# EAGLE board Headlightsv2 (EAGLE 7.6.0)
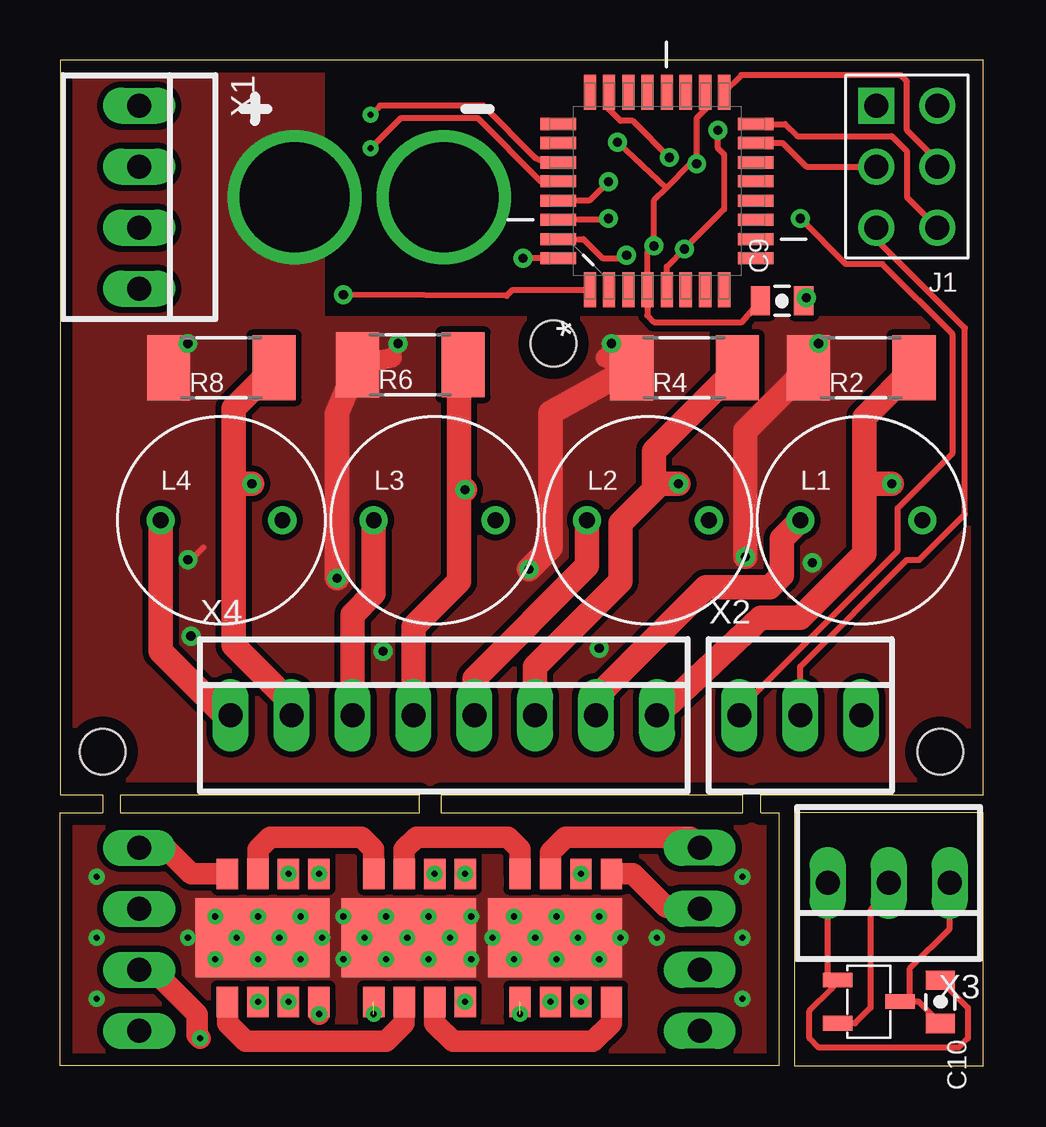
[diagram p0: board, top side]
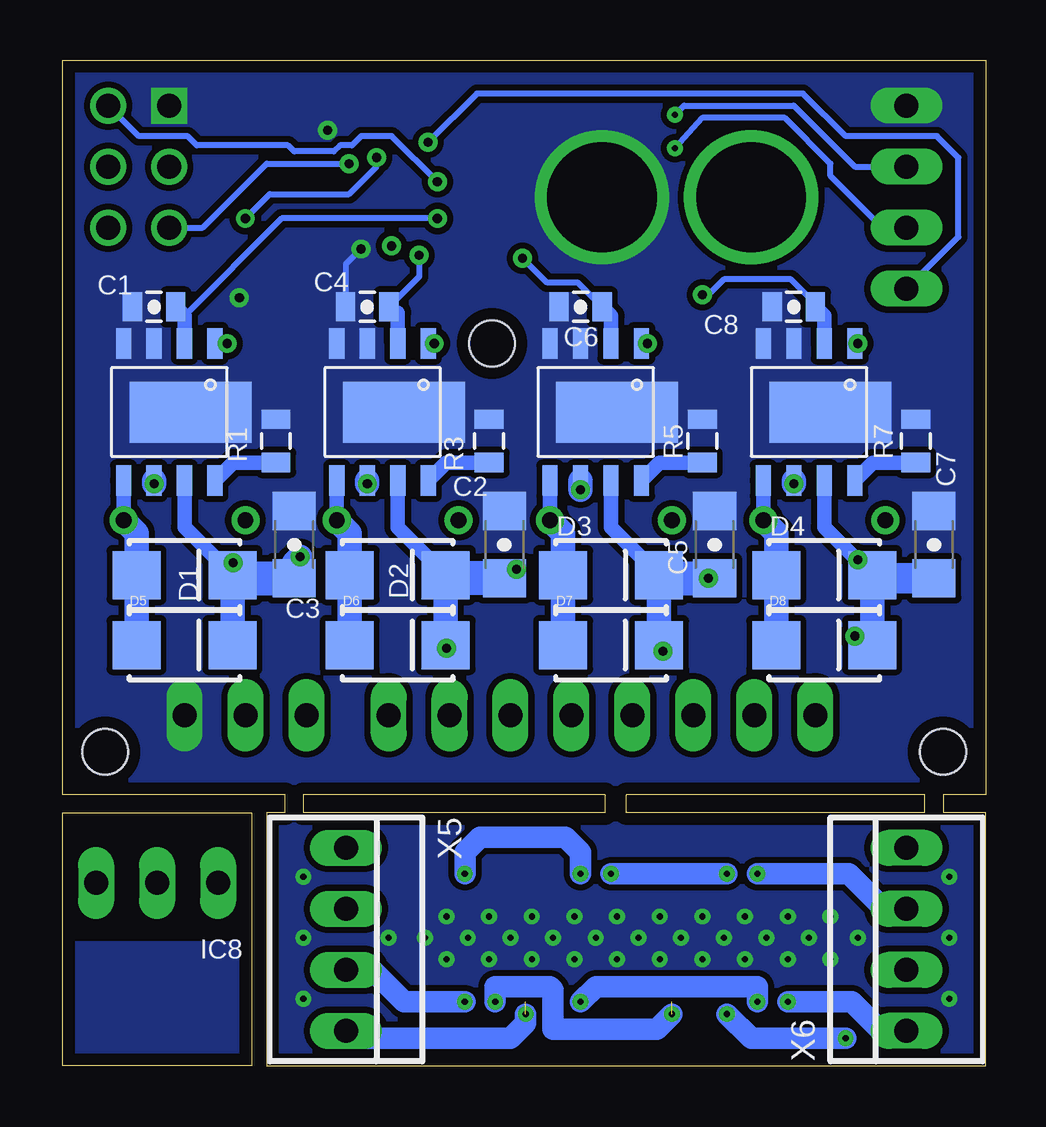
[diagram p1: board, bottom side, seen from below]

Size 38.48 x 41.91 mm. Coordinates in mm from the lower left corner, seen from the top.
Outline: 0,11.3 1.78,11.3 1.78,10.54 0,10.54 0,0 29.97,0 29.97,10.54 29.21,10.54 29.21,11.3 38.48,11.3 38.48,41.91 0,41.91 0,11.3
Outline: 2.54,11.3 14.99,11.3 14.99,10.54 2.54,10.54 2.54,11.3
Outline: 15.88,11.3 28.45,11.3 28.45,10.54 15.88,10.54 15.88,11.3
Outline: 30.61,10.54 30.61,0 38.48,0 38.48,10.54 30.61,10.54
Copper layers (1*16): Top 0.035mm / dielectric 1.5mm / Bottom 0.035mm
Design rules "PCBWAY": minimum track width 10mil, minimum drill 10mil, track to track 8mil, track to pad 8mil, pad to pad 8mil, via to via 8mil, smd to smd 8mil, copper to edge 20mil, drill to drill 8mil, minimum pad ring 10mil, minimum via ring 8mil, stop-mask expansion 4mil, vias tented up to drill 0mil, thermal gap 10mil
Holes 1.91 mm at 36.7,13.08 1.78,13.08 20.57,30.1

## Footprints (pad centres in the part's own frame; a part is rotated, then mirrored left to right if it is on the bottom)
0805-CAP = smd 0.8 x 1.2: 1 -0.9,0; 2 0.9,0
1206-CAP = smd 1.6 x 1.8: 1 -1.4,0; 2 1.4,0
SMA-DIODE_ALT = smd 2 x 2: A -2,0; C 2,0
PG-DSO-8-27 = smd 0.635 x 1.27: P$1 0,0; P$2 1.27,0; P$3 2.54,0; P$4 3.81,0; P$5 3.81,5.715; P$6 2.54,5.715; P$7 1.27,5.715; P$8 0,5.715 | smd 5.08 x 2.54: P$9 1.016,2.857
LED_RGBW_CUSTOM = smd 0.889 x 1.27: 1 0,-0.254; 2 1.27,-0.254; 3 2.54,-0.254; 4 3.81,-0.254; 5 3.81,5.08; 6 2.54,5.08; 7 1.27,5.08; 8 0,5.08 | smd 5.588 x 3.302: 9 1.46,2.413
SOT-23-3 = smd 1.219 x 0.61: 1 -1.36,0.78; 2 -1.36,-1.02; 3 1.24,-0.12
2X3PIN_.1' = drill 0.991: P$1 -1.27,1.27; P$2 1.27,1.27; P$3 -1.27,-1.27; P$4 1.27,-1.27; P$5 -1.27,-3.81 | drill 0.991 square: P$6 1.27,-3.81
IND_RLB_SERIES = drill 0.66: P$1 -2.54,0; P$2 2.54,0
0805 = smd 0.8 x 1.2: 1 -0.9,0; 2 0.9,0
R2010 = smd 1.8 x 2.7: 1 -2.2,0; 2 2.2,0
QFP80P900X900X120-32N = smd 1.473 x 0.508: 1 -4.115,2.794; 2 -4.115,2.007; 3 -4.115,1.194; 4 -4.115,0.406; 5 -4.115,-0.406; 6 -4.115,-1.194; 7 -4.115,-2.007; 8 -4.115,-2.794; 17 4.115,-2.794; 18 4.115,-2.007; 19 4.115,-1.194; 20 4.115,-0.406; 21 4.115,0.406; 22 4.115,1.194; 23 4.115,2.007; 24 4.115,2.794 | smd 0.508 x 1.473: 9 -2.794,-4.115; 10 -2.007,-4.115; 11 -1.194,-4.115; 12 -0.406,-4.115; 13 0.406,-4.115; 14 1.194,-4.115; 15 2.007,-4.115; 16 2.794,-4.115; 25 2.794,4.115; 26 2.007,4.115; 27 1.194,4.115; 28 0.406,4.115; 29 -0.406,4.115; 30 -1.194,4.115; 31 -2.007,4.115; 32 -2.794,4.115
22-23-2041 = drill 1 long: 1 -3.81,0; 2 -1.27,0; 3 1.27,0; 4 3.81,0
22-23-2031 = drill 1 long: 1 -2.54,0; 2 0,0; 3 2.54,0
22-23-2081 = drill 1 long: 1 -8.89,0; 2 -6.35,0; 3 -3.81,0; 4 -1.27,0; 5 1.27,0; 6 3.81,0; 7 6.35,0; 8 8.89,0

## Placement (x,y rotation side)
C1  10uF  [0805-CAP]  34.67,31.62 180 bottom
C2  1uF  [1206-CAP]  20.07,21.72 90 bottom
C3  1uF  [1206-CAP]  28.83,21.72 90 bottom
C4  10uF  [0805-CAP]  25.78,31.62 180 bottom
C5  1uF  [1206-CAP]  11.3,21.72 90 bottom
C6  10uF  [0805-CAP]  16.89,31.62 180 bottom
C7  1uF  [1206-CAP]  2.16,21.72 90 bottom
C8  10uF  [0805-CAP]  8,31.62 180 bottom
C9  0.33uF  [0805-CAP]  30.1,31.88 0 top
C10  0.33uF  [0805-CAP]  36.7,2.67 90 top
D1  [SMA-DIODE_ALT]  33.4,20.45 0 bottom
D2  [SMA-DIODE_ALT]  24.51,20.45 0 bottom
D3  [SMA-DIODE_ALT]  15.62,20.45 0 bottom
D4  [SMA-DIODE_ALT]  6.73,20.45 0 bottom
D5  [SMA-DIODE_ALT]  33.4,17.53 0 bottom
D6  [SMA-DIODE_ALT]  24.51,17.53 0 bottom
D7  [SMA-DIODE_ALT]  15.62,17.53 0 bottom
D8  [SMA-DIODE_ALT]  6.73,17.53 0 bottom
IC1  ILD6150_LED_DRIVER  [PG-DSO-8-27]  32.13,30.1 180 bottom
IC2  LED_RGBW_CONF2  [LED_RGBW_CUSTOM]  19.18,2.92 0 top
IC3  ILD6150_LED_DRIVER  [PG-DSO-8-27]  23.24,30.1 180 bottom
IC4  ILD6150_LED_DRIVER  [PG-DSO-8-27]  14.35,30.1 180 bottom
IC5  ILD6150_LED_DRIVER  [PG-DSO-8-27]  5.46,30.1 180 bottom
IC6  LED_RGBW_CONF2  [LED_RGBW_CUSTOM]  13.08,2.92 0 top
IC7  LED_RGBW_CONF2  [LED_RGBW_CUSTOM]  6.99,2.92 0 top
IC8  TEMP_MCP9701  [SOT-23-3]  33.78,2.79 0 top
J1  ISPHEADER  [2X3PIN_.1']  35.31,36.2 180 top
L1  33uH  [IND_RLB_SERIES]  33.4,22.73 0 top
L2  33uH  [IND_RLB_SERIES]  24.51,22.73 0 top
L3  33uH  [IND_RLB_SERIES]  15.62,22.73 0 top
L4  33uH  [IND_RLB_SERIES]  6.73,22.73 0 top
R1  10k  [0805]  29.59,26.04 90 bottom
R2  .11  [R2010]  33.4,29.08 180 top
R3  10k  [0805]  20.7,26.04 90 bottom
R4  .11  [R2010]  26.04,29.08 180 top
R5  10k  [0805]  11.81,26.04 90 bottom
R6  .11  [R2010]  14.61,29.21 180 top
R7  10k  [0805]  2.92,26.04 90 bottom
R8  .11  [R2010]  6.73,29.08 180 top
U1  ATTINY48-AU  [QFP80P900X900X120-32N]  24.89,36.45 90 top
X1  22-23-2041  [22-23-2041]  3.3,36.2 270 top
X2  22-23-2031  [22-23-2031]  30.86,14.61 0 top
X3  22-23-2031  [22-23-2031]  34.54,7.62 180 top
X4  22-23-2081  [22-23-2081]  16,14.61 0 top
X5  22-23-2041  [22-23-2041]  26.67,5.27 270 bottom
X6  22-23-2041  [22-23-2041]  3.3,5.27 90 bottom

## Library data of the parts
C1 C4 C6 C8 = SparkFun-Capacitors; PROD_ID: CAP-11330
C2 C3 C5 C7 = SparkFun-Capacitors
C9 C10 = SparkFun-Capacitors; PROD_ID: CAP-08469
D1-D8 = SparkFun-DiscreteSemi
IC1-IC8 J1 L1-L4 = lolomolo
R1 R3 R5 R7 = SparkFun-Resistors; PROD_ID: RES-11622
R2 R4 R6 R8 = SparkFun-Resistors; PROD_ID: RES-08354
U1 = Atmel_By_element14_Batch_1-00; MPN: ATTINY48-AU; OC_FARNELL: 1636953; OC_NEWARK: 68T3768; PACKAGE: QFP-32; SUPPLIER: Atmel
X1 X5 X6 = con-molex; MF: MOLEX; MPN: 22-23-2041; OC_FARNELL: 1462920; OC_NEWARK: 38C0355
X2 X3 = con-molex; MF: MOLEX; MPN: 22-23-2031; OC_FARNELL: 1462950; OC_NEWARK: 30C0862
X4 = con-molex; MF: MOLEX; MPN: 22-23-2081; OC_FARNELL: 1756826; OC_NEWARK: 01C7592

## Nets
5V: C9.1 J1.P$2 U1.4 U1.18 X1.4 X2.2
5VO: IC8.2 X3.2
BA: L3.P$1 X4.3
BAO: IC7.6 X6.3
BC: IC4.P$6 R6.1 X4.4
BCO: IC2.5 X5.2
DIMB: C6.1 IC4.P$2 U1.32
DIMG: C4.1 IC3.P$2 U1.31
DIMR: C1.1 IC1.P$2 U1.30
DIMW: C8.1 IC5.P$2 U1.1
GA: L2.P$1 X4.5
GAO: IC7.4 X6.2
GC: IC3.P$6 R4.1 X4.6
GCO: IC2.3 X5.3
GND: C1.2 C2.2 C3.2 C4.2 C5.2 C6.2 C7.2 C8.2 C9.2 IC1.P$3 IC1.P$4 IC1.P$9 IC3.P$3 IC3.P$4 IC3.P$9 IC4.P$3 IC4.P$4 IC4.P$9 IC5.P$3 IC5.P$4 IC5.P$9 J1.P$6 R1.2 R3.2 R5.2 R7.2 U1.5 X1.1 X2.3
GNDO: C10.1 IC8.3 X3.1
HEAT: IC2.9 IC6.9 IC7.9
MISO: J1.P$1 U1.16
MOSI: J1.P$4 U1.15
N$1: IC1.P$8 R1.1
N$2: IC3.P$8 R3.1
N$3: D2.A D6.A IC3.P$5 L2.P$2
N$4: IC4.P$8 R5.1
N$5: D1.A D5.A IC1.P$5 L1.P$2
N$6: D3.A D7.A IC4.P$5 L3.P$2
N$7: IC5.P$8 R7.1
N$8: D4.A D8.A IC5.P$5 L4.P$2
N$9: IC2.2 IC6.1
N$10: IC6.2 IC7.1
N$11: IC6.4 IC7.3
N$12: IC2.4 IC6.3
N$13: IC2.8 IC6.7
N$14: IC6.8 IC7.7
N$15: IC6.6 IC7.5
N$16: IC2.6 IC6.5
RA: L1.P$1 X4.7
RAO: IC7.2 X6.1
RC: IC1.P$6 R2.1 X4.8
RCO: IC2.1 X5.4
RESET: J1.P$5 U1.29
SCK: J1.P$3 U1.17
SCL: U1.28 X1.3
SDA: U1.27 X1.2
TEMP1: U1.23 X2.1
TEMP1O: C10.2 IC8.1 X3.3
VBAT: C2.1 C3.1 C5.1 C7.1 D1.C D2.C D3.C D4.C D5.C D6.C D7.C D8.C IC1.P$1 IC1.P$7 IC3.P$1 IC3.P$7 IC4.P$1 IC4.P$7 IC5.P$1 IC5.P$7 R2.2 R4.2 R6.2 R8.2
WA: L4.P$1 X4.1
WAO: IC7.8 X6.4
WC: IC5.P$6 R8.1 X4.2
WCO: IC2.7 X5.1

## Tracks (layer width: path | path; a pad name or v marks a point on that pad's centre or on a via)
5V  (via drill 0.38)
  Top 0.254: J1.P$2 34.04,34.42 37.72,30.73 37.72,22.99 35.81,21.08 35.31,21.08 30.86,16.64 X2.2 | v23.24,38.48 25.27,36.58 | 25.27,36.58 24.77,36.07 v24.77,34.16 24.49,33.88 U1.4 24.49,31.27 24.77,30.99 28.44,30.99 C9.1 | 25.27,36.58 26.29,37.59 v26.54,37.59 26.54,39.5 26.92,39.88 26.92,40.54 U1.18
  Bottom 0.254: J1.P$2 32.64,34.92 29.97,37.59 v26.54,37.59 | v23.24,38.48 21.21,40.51 7.62,40.51 5.84,38.73 2.03,38.73 1.14,37.85 1.14,34.54 X1.4
5VO
  Top 0.254: X3.2 33.78,6.48 33.78,2.41 33.14,1.77 IC8.2
BA
  Top 1.016: L3.P$1 13.08,19.68 12.19,18.8 X4.3
BAO  (via drill 0.25)
  Bottom 0.889: IC7.6 5.71,8 4.25,6.54 X6.3
  other vias: 9.53,8
BC  (via drill 0.38)
  Top 1.016: R6.1 16.64,27.9 16.64,24 | 16.64,24 16.64,20.19 14.73,18.29 X4.4 | 16.64,24 v16.89,24
  Bottom 1.016: v16.89,24 IC4.P$6
BCO
  Top 0.889: IC2.5 23.88,8 25.27,6.6 X5.2
DIMB  (via drill 0.38)
  Top 0.254: U1.32 v19.3,33.66
  Bottom 0.254: C6.1 17.01,32.64 18.29,32.64 v19.3,33.66
  Bottom 0.61: IC4.P$2 15.62,31.25 C6.1
DIMG  (via drill 0.38)
  Top 0.254: U1.31 21.82,34.44 22.61,33.66 23.5,33.66 v23.62,33.78
  Bottom 0.254: v23.62,33.78 23.62,32.88 C4.1
  Bottom 0.61: IC3.P$2 24.51,31.38 C4.1
DIMR  (via drill 0.38)
  Top 0.254: v22.86,35.31 22.81,35.26 U1.30
  Bottom 0.254: 33.4,31.25 29.35,35.31 v22.86,35.31
  Bottom 0.61: IC1.P$2 33.4,31.25 C1.1
DIMW  (via drill 0.38)
  Top 0.254: v11.81,32.13 18.62,32.08 18.87,32.33 U1.1
  Bottom 0.254: 6.97,31.62 7.11,31.76 | 7.11,31.76 8.12,32.77 10.92,32.77 11.56,32.13 v11.81,32.13 | C8.1 7.11,31.76
  Bottom 0.61: IC5.P$2 6.73,31.25 C8.1
GA
  Top 1.016: L2.P$1 21.97,20.83 17.27,16.13 X4.5
GAO  (via drill 0.25)
  Top 0.889: IC7.4 v10.79,2.16 | v5.84,1.14 5.71,1.27 5.71,2.16 3.87,4 X6.2
  Bottom 0.889: v10.79,2.16 9.78,1.14 v5.84,1.14
GC  (via drill 0.38)
  Top 1.016: R4.1 24.77,25.61 24.77,24.26 25.02,24.26 | v25.78,24.26 25.02,24.26 | 25.02,24.26 23.37,22.61 23.37,20.19 19.81,16.64 X4.6
  Bottom 1.016: IC3.P$6 v25.78,24.26
GCO  (via drill 0.25)
  Bottom 0.889: IC2.3 24.26,2.67 25.65,4.06 X5.3
  other vias: 21.72,2.67
GND  (via drill 0.38, 4.57)
  Top 0.254: U1.5 25.3,33.3 v26.04,34.04 27.69,35.69 27.69,37.97 27.43,38.23 v27.43,38.99
  Top 0.406: C9.2 v31.11,32
  Bottom 0.254: v26.04,34.04 26.68,33.39 C4.2 | J1.P$6 34.04,40.39
  other vias: 16,36.2
  pour Bottom (isolate 0.254, no thermals): 0,11.18 38.48,11.18 38.48,41.91 0,41.91
GNDO
  Top 0.254: X3.1 37.08,5.71 35.43,4.06 35.43,2.7 IC8.3 35.8,2.67 C10.1
HEAT  (via drill 0.25)
  other vias: 1.52,5.33 1.52,7.87 1.52,2.79 5.33,5.33 6.48,6.22 6.48,4.45 7.37,5.33 8.26,6.22 8.26,4.45 9.14,5.33 10.03,6.22 10.03,4.45 10.92,5.33 11.81,6.22 11.81,4.45 12.7,5.33 13.59,6.22 13.59,4.45 14.48,5.33 15.37,4.45 15.37,6.22 16.26,5.33 17.14,6.22 17.14,4.45 18.03,5.33 18.92,4.45 18.92,6.22 19.81,5.33 20.7,6.22 20.7,4.45 21.59,5.33 22.48,6.22 22.48,4.45 23.37,5.33 24.89,5.33 28.45,5.33 28.45,7.87 28.45,2.79
  pour Top (isolate 0.254, no thermals): 0,10.54 29.97,10.54 29.97,0.13 0,0.13
  pour Bottom (isolate 0.254, no thermals): 0,10.54 29.97,10.54 29.97,0.13 0,0.13
HEATPAD
  pour Bottom (no thermals): 30.61,5.08 30.61,0 38.48,0 38.48,5.08
MISO
  Top 0.254: U1.16 30.23,39.24 30.73,38.73 34.67,38.73 35.31,38.1 35.31,36.2 J1.P$1
MOSI
  Top 0.254: U1.15 30.12,38.46 31.11,37.47 J1.P$4
N$1
  Bottom 0.61: R1.1 31.38,25.14 IC1.P$8
N$2
  Bottom 0.61: R3.1 22.49,25.14 IC3.P$8
N$3
  Bottom 0.61: IC3.P$5 L2.P$2
  Bottom 1.016: L2.P$2 26.51,22.19 D2.A D6.A
N$4
  Bottom 0.61: R5.1 13.6,25.14 IC4.P$8
N$5
  Bottom 0.61: IC1.P$5 L1.P$2
  Bottom 1.016: L1.P$2 35.4,22.19 D1.A D5.A
N$6
  Bottom 0.61: IC4.P$5 L3.P$2
  Bottom 1.016: L3.P$2 17.62,22.19 D3.A D7.A
N$7
  Bottom 0.61: R7.1 4.71,25.14 IC5.P$8
N$8
  Bottom 0.61: IC5.P$5 L4.P$2
  Bottom 1.016: L4.P$2 8.73,22.19 D4.A D8.A
N$9  (via drill 0.25)  (1 unrouted)
  Bottom 0.889: IC2.2 20.45,3.3 18.16,3.3 18.03,3.17 18.03,1.52 13.72,1.52 v13.08,2.16
  other vias: 20.45,2.67
N$10
  Top 0.889: IC7.1 6.99,1.78 7.75,1.02 13.59,1.02 14.35,1.78 IC6.2
N$11  (via drill 0.25)
  Bottom 0.889: IC6.4 16.26,3.3 9.53,3.3 IC7.3
  other vias: 16.89,2.67 9.53,2.67
N$12
  Top 0.889: IC6.3 15.62,1.78 16.38,1.02 22.23,1.02 22.99,1.78 IC2.4
N$13
  Top 0.889: IC6.7 14.35,9.02 14.86,9.53 18.67,9.53 19.18,9.02 IC2.8
N$14
  Top 0.889: IC7.7 8.26,9.02 8.76,9.53 12.57,9.53 13.08,9.02 IC6.8
N$15  (via drill 0.25)
  Bottom 0.889: IC7.5 IC6.6
  other vias: 10.79,8 15.62,8
N$16  (via drill 0.25)
  Bottom 0.889: IC6.5 16.89,8.89 17.53,9.53 21.08,9.53 21.72,8.89 IC2.6
  other vias: 21.72,8 16.89,8
RA
  Top 1.016: L1.P$1 30.1,21.97 30.1,20.45 29.59,19.94 26.92,19.94 22.35,15.37 X4.7
RAO  (via drill 0.25)
  Bottom 0.889: IC7.2 5.59,2.67 4.38,1.46 X6.1
  other vias: 8.26,2.67
RC  (via drill 0.38)
  Top 1.016: R2.1 33.53,27.01 33.53,24.26 | 33.53,24.26 33.53,21.34 30.86,18.67 29.21,18.67 X4.8 | v34.67,24.26 33.53,24.26
  Bottom 1.016: IC1.P$6 v34.67,24.26
RCO  (via drill 0.25)  (1 unrouted)
  Bottom 0.889: v19.18,2.16 19.18,1.78 19.81,1.14 26.29,1.14 X5.4
RESET  (via drill 0.38)
  Top 0.254: U1.29 20.8,36.07 22.1,36.07 v22.86,36.83
  Bottom 0.254: J1.P$5 35.31,38.73 33.27,38.73 32.89,38.35 29.08,38.35 28.83,38.1 27.18,38.1 26.92,38.35 26.42,38.35 26.04,38.73 24.77,38.73 v22.86,36.83
SCK
  Top 0.254: J1.P$3 36.58,37.72 35.31,38.99 35.31,41.02 35.05,41.27 28.4,41.27 U1.17
SCL  (via drill 0.25)
  Top 0.254: v12.95,38.23 14.22,39.5 17.4,39.5 20.04,36.85 U1.28
  Bottom 0.254: X1.3 4.32,34.92 6.48,37.08 6.48,37.59 8.38,39.5 11.81,39.5 v12.95,38.23
SDA  (via drill 0.25)
  Top 0.254: U1.27 20.73,37.59 20.19,37.59 20.07,37.72 19.81,37.85 17.65,40.01 13.34,40.01 v12.95,39.62
  Bottom 0.254: v12.95,39.62 12.57,40.01 8,40.01 5.46,37.47 X1.2
TEMP1  (via drill 0.38)
  Top 0.254: v30.86,35.31 32.77,33.4 34.29,33.4 37.21,30.48 37.21,25.53 34.92,23.24 34.92,21.46 28.32,14.86 X2.1 | v25.4,37.85 23.88,39.37 23.37,39.37 22.89,39.85 U1.23
  Bottom 0.254: v30.86,35.31 29.84,36.32 26.54,36.32 25.4,37.47 v25.4,37.85
TEMP1O
  Top 0.254: X3.3 32,3.61 IC8.1 32.15,3.19 31.24,2.29 31.24,1.14 31.62,0.76 37.47,0.76 37.85,1.14 37.85,2.42 C10.2
VBAT  (via drill 0.38, 4.57)
  Top 0.254: v5.33,21.08 5.71,21.34 5.97,21.59
  Top 0.61: v5.33,30.1 4.45,29.17 R8.2 | v14.1,30.1 13.84,29.5 | v22.99,30.1 22.73,29.5 | v31.62,30.1 31.62,29.5 R2.2
  Top 0.813: R4.2 22.73,29.5 | R6.2 13.84,29.5
  Top 1.016: R6.2 11.56,27.22 v11.56,20.32 | R4.2 20.45,27.22 20.45,21.59 19.94,21.08 v19.56,20.7 | R2.2 28.57,26.46 v28.57,21.21
  Bottom 0.254: D4.C 4.73,20.48 v5.33,21.08
  Bottom 0.61: IC3.P$7 24.51,22.45 D2.C | IC1.P$7 33.4,22.45 D1.C | IC4.P$7 15.62,22.45 D3.C | IC5.P$7 6.73,22.45 D4.C | IC5.P$1 v5.33,30.1 | IC4.P$1 v14.1,30.1 | IC3.P$1 v22.99,30.1 | IC1.P$1 v31.62,30.1
  Bottom 0.762: C2.1 19.94,20.44 v19.56,20.7
  Bottom 1.016: v28.57,21.21 28.83,20.95 C3.1 | D7.C D3.C | D8.C D4.C | D6.C D2.C | D5.C D1.C
  Bottom 1.27: C7.1 4.6,20.32 D4.C
  Bottom 1.422: D1.C 31.27,20.32 C3.1 | 22.38,20.32 D2.C 21.97,20.45 21.84,20.32 C2.1 | D3.C 13.49,20.32 v11.56,20.32 C5.1
  other vias: 9.78,36.2 13.46,17.27 5.46,17.91 22.48,17.4 31.37,20.95
  pour Top (isolate 0.254, no thermals): 0,11.18 38.48,11.18 38.48,31.11 10.92,31.11 10.92,41.91 0,41.91
WA
  Top 1.016: L4.P$1 4.19,17.27 6.86,14.61 X4.1
WAO
  Top 0.889: IC7.8 5.46,8 4.38,9.08 X6.4
WC  (via drill 0.38)
  Top 1.016: R8.1 7.24,27.39 7.24,24.26 | v8,24.26 7.24,24.26 | 7.24,24.26 7.24,17.53 9.65,15.11 X4.2
  Bottom 1.016: IC5.P$6 v8,24.26
WCO
  Top 0.889: X5.1 26.29,9.53 21.08,9.53 20.45,8.89 IC2.7